# Altium PCB LED_chaser.PcbDoc
Units mm, origin at the board's own origin, x right, y up, seen from the top; angles counter-clockwise.
Board outline 59.5 x 60 mm, 2 copper layers (Top Layer, Bottom Layer), stack 1.1 mm thick; 19 components, 17 nets, 59 pads, 3 vias.
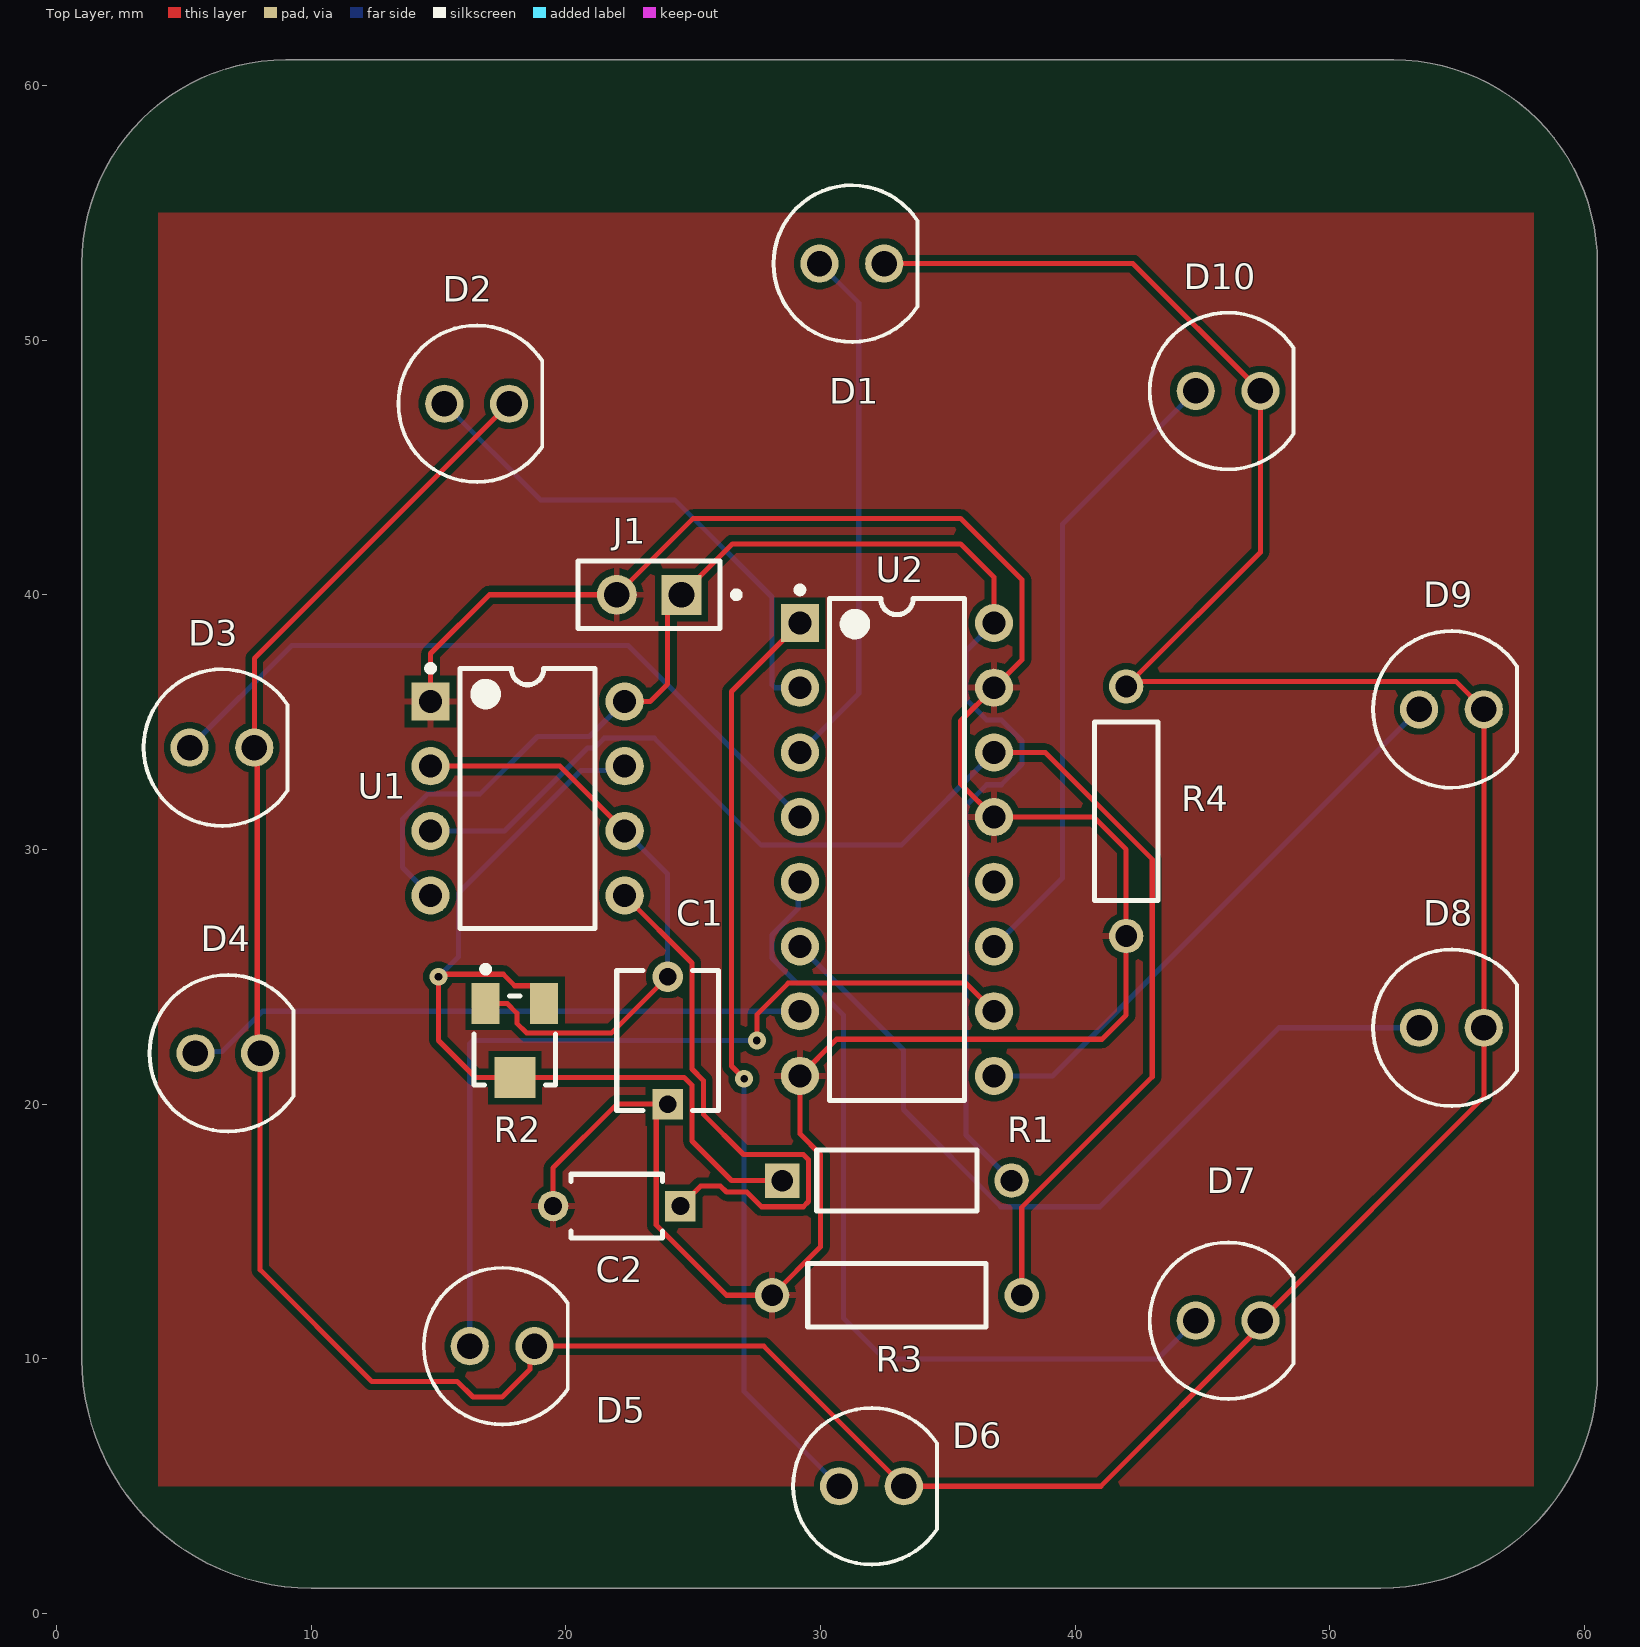
[diagram p0: Top Layer view]
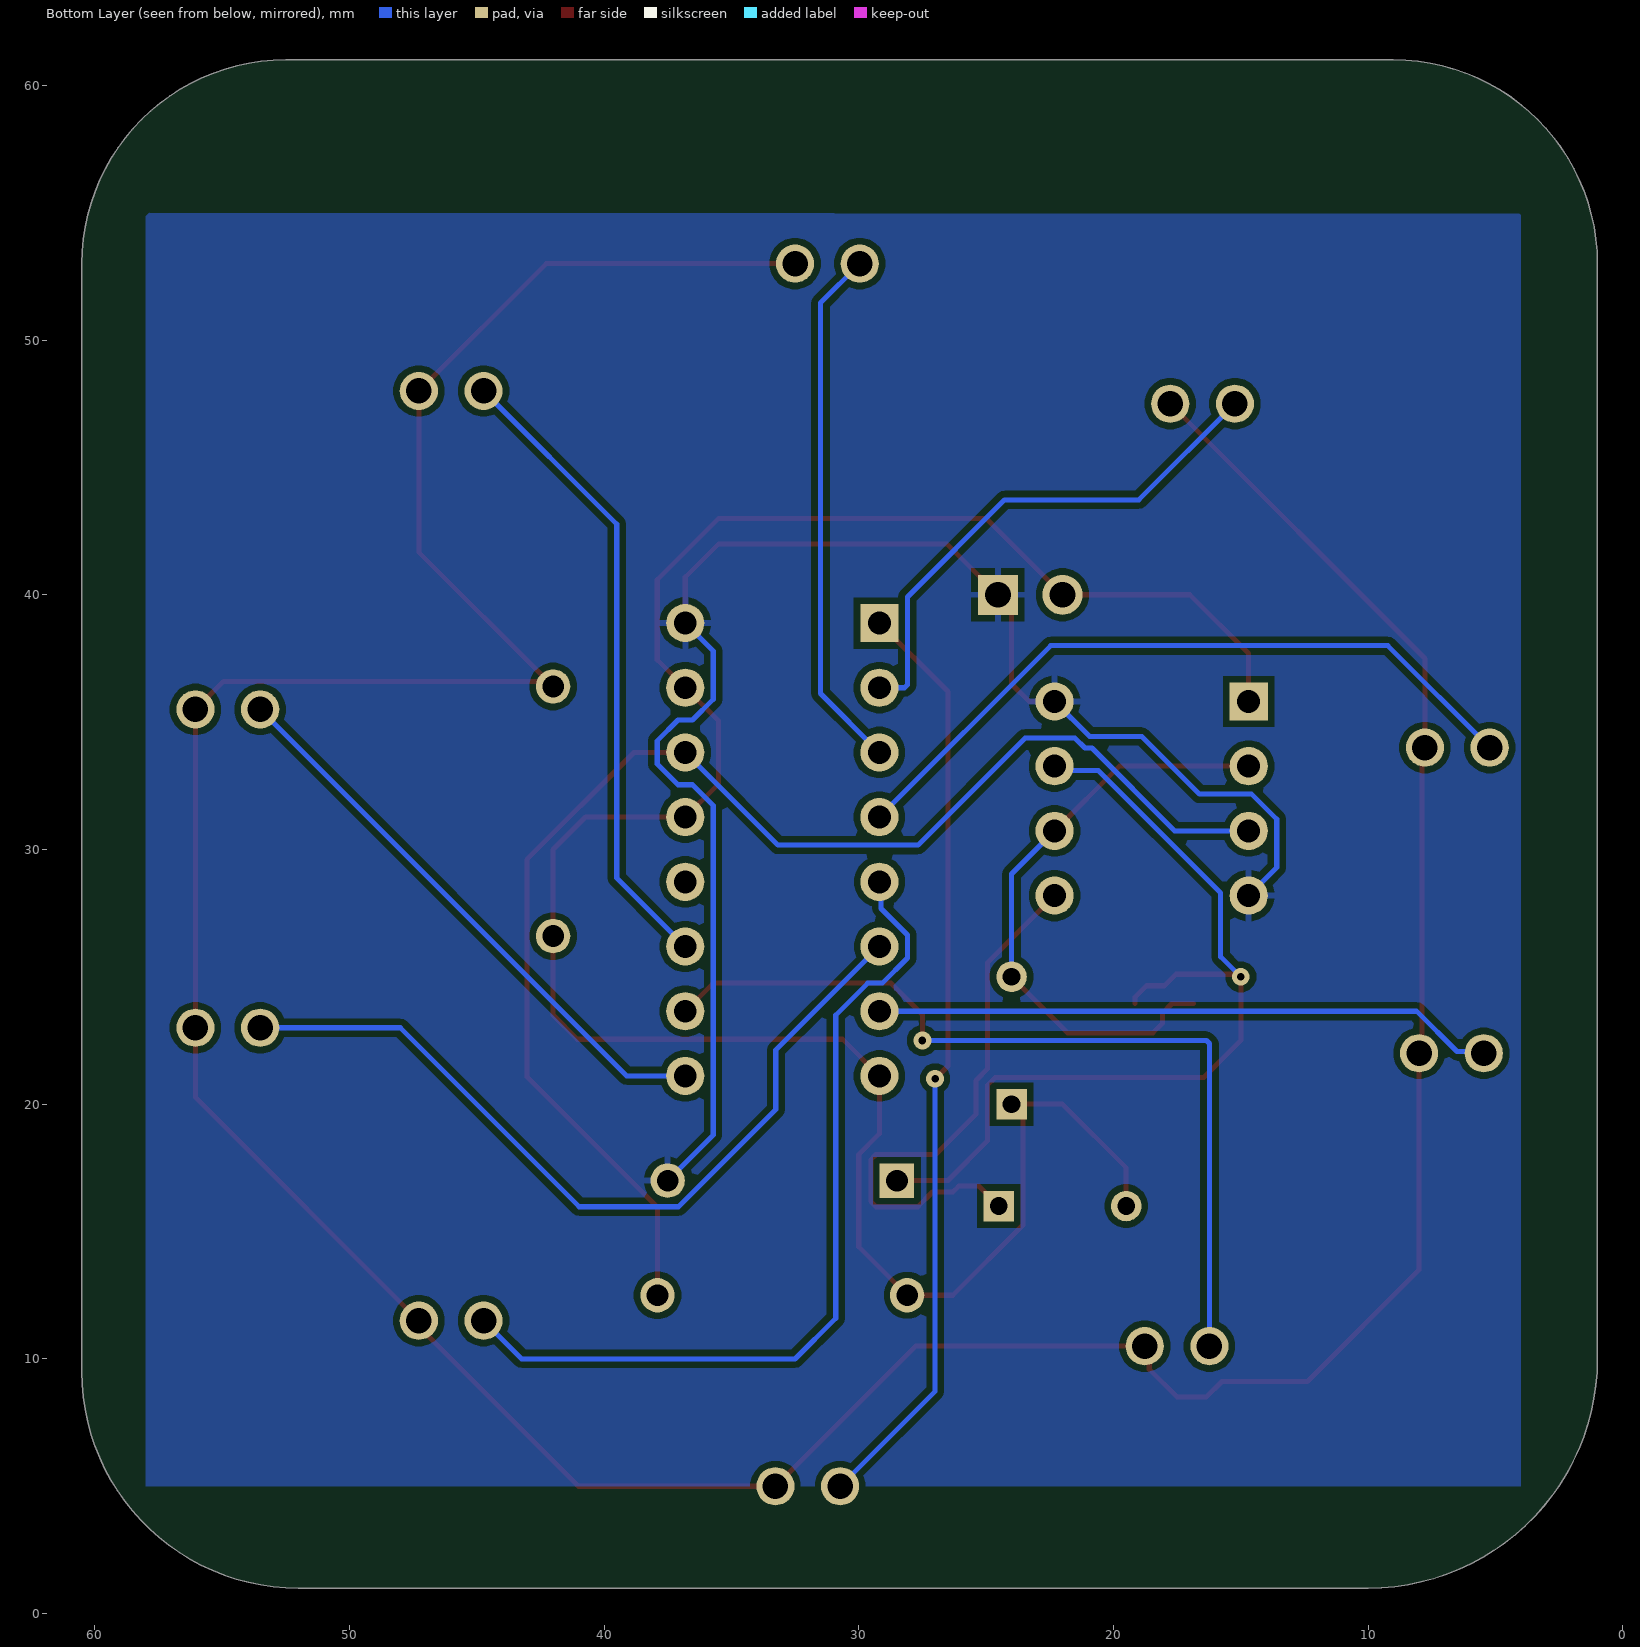
[diagram p1: Bottom Layer view, seen from below]
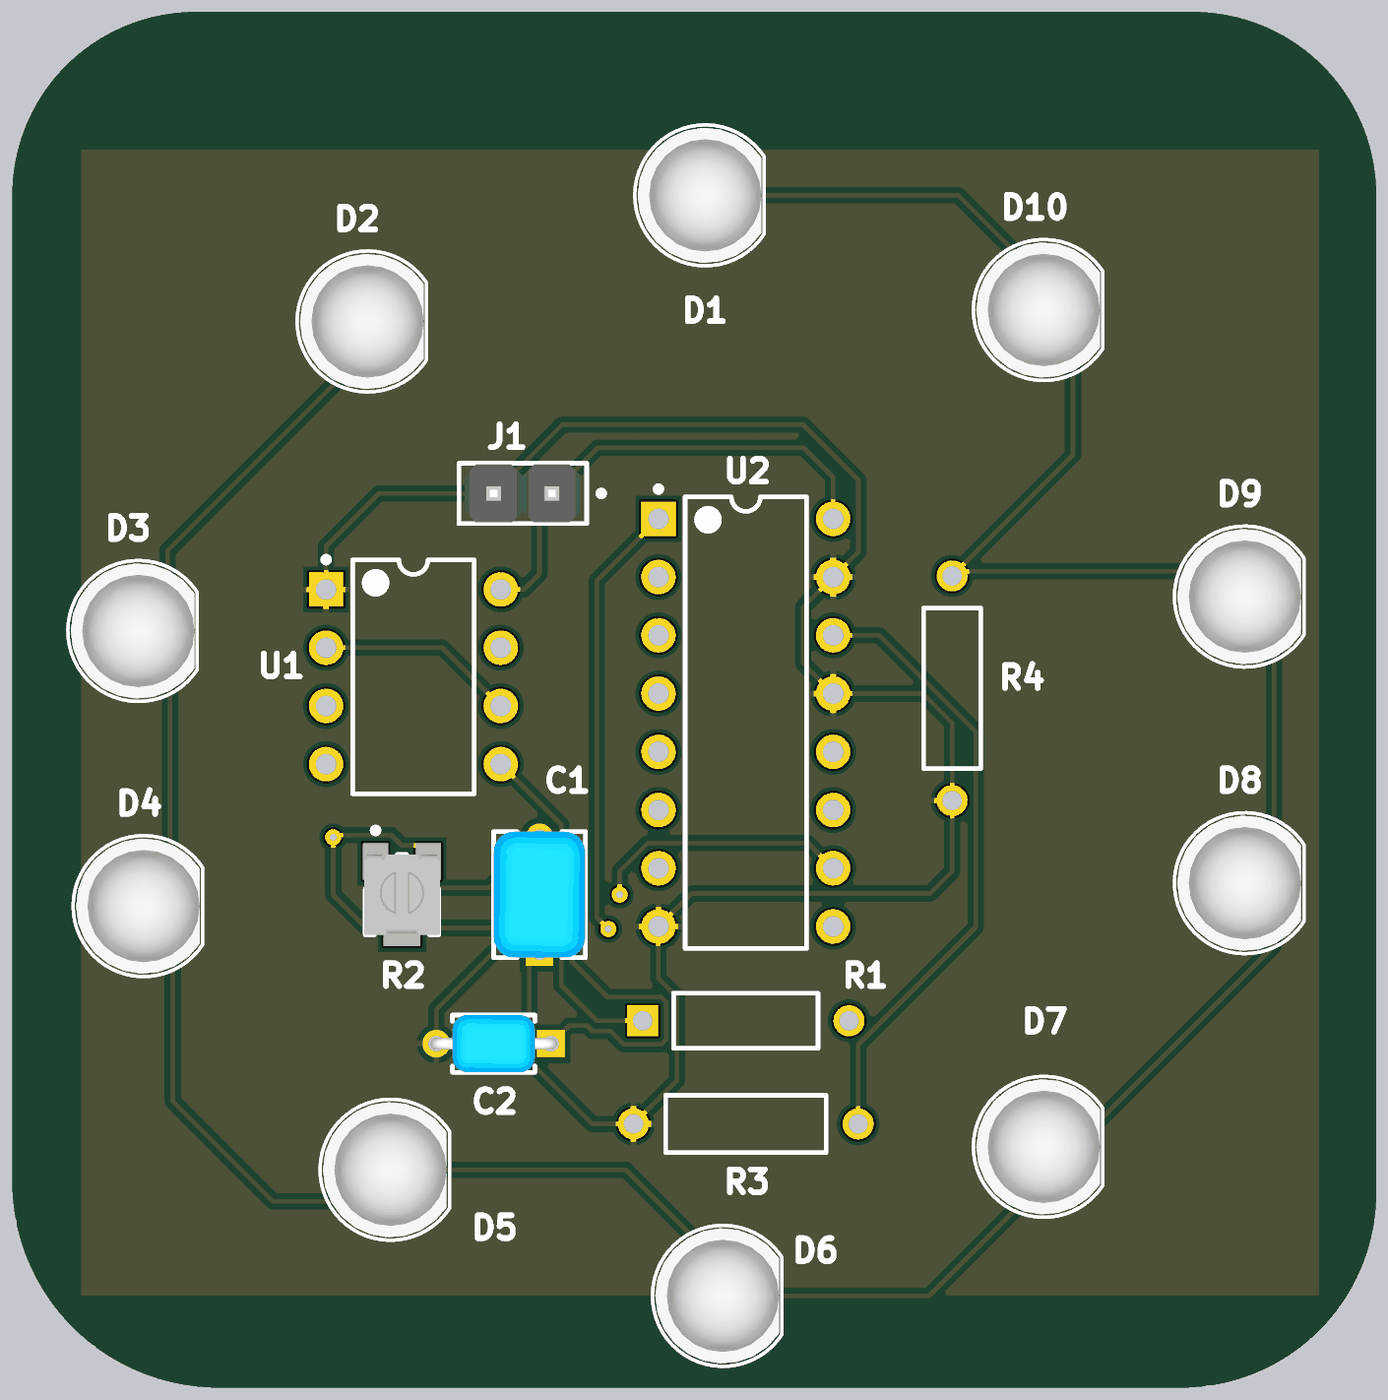
[diagram p2: 3D render of the assembled board from above, using the file's embedded part models]

## Layer stack, top to bottom
Top Solder: solder mask 0.05, SM-001, Dk 4
Top Layer: signal copper 0.1
Dielectric 1: dielectric 0.9, FR-4, Dk 4.8
Bottom Layer: signal copper 0.1
Bottom Solder: solder mask 0.05, SM-001, Dk 4

## Board outline
10,1 52,1 ccw(c52,9.5) 60.5,9.5 60.5,53 ccw(c52.5,53) 52.5,61 9.011,61 ccw(c9,53) 1,53 1,10 ccw(c10,10)

## Design rules (kind name [scope] priority, off if disabled: settings)
Clearance [All] p1: gap=0.25 ignorepadtopadclearanceinfootprint=FALSE
PolygonConnect [All] p1: connectstyle=Relief reliefconductorwidth=0.254 reliefentries=4 polygonreliefangle="90 Angle" airgapwidth=0.254
RoutingVias [All] p1: holewidth=0.4 width=0.5 viastyle="Through Hole" minholewidth=0.4 minwidth=0.5 maxholewidth=0.4 maxwidth=0.5
SolderMaskExpansion [All] p1: expansion=0.102 istentingtop=FALSE
Width Width_POW [(InNet('VCC') OR InNet('GND'))] p1: maxlimit=0.3 minlimit=0.2 preferedwidth=0.2
Width [All] p2: maxlimit=0.2 minlimit=0.1 preferedwidth=0.2
30 further rules are at their usual default settings.

## Components (designator, comment, footprint, x,y, rotation, side; value= is the part's Value field where it differs from the comment)
C1 "RCER71E226MWM1H03A" FP-RCEWM1-MFG 24,22.5 r90 top
C2 "RCER71H103K0K1H03B" FP-RCE0K1-MFG 22,16 r180 top
D1 "151051BS04000" WL-TMRC_D5.9H8.7 31.23,53 r0 top
D2 "151051BS04000" WL-TMRC_D5.9H8.7 16.5,47.5 r0 top
D3 "151051BS04000" WL-TMRC_D5.9H8.7 6.5,34 r0 top
D4 "151051BS04000" WL-TMRC_D5.9H8.7 6.73,22 r0 top
D5 "151051BS04000" WL-TMRC_D5.9H8.7 17.5,10.5 r0 top
D6 "151051BS04000" WL-TMRC_D5.9H8.7 32,5 r0 top
D7 "151051BS04000" WL-TMRC_D5.9H8.7 46,11.5 r0 top
D8 "151051BS04000" WL-TMRC_D5.9H8.7 54.77,23 r0 top
D9 "151051BS04000" WL-TMRC_D5.9H8.7 54.77,35.5 r0 top
D10 "151051BS04000" WL-TMRC_D5.9H8.7 46,48 r0 top
J1 "M20-9990246" FP-M20-9990246-MFG 23.27,40 r180 top
R1 "MFR-25FBF52-1M" RESA60-630X240 33,17 r0 top
R2 "3313J-1-503E" BOUR-3313J-1_V 18,22.5 r270 top
R3 "OD103JE" OMTE-RES7X2.5-2 33,12.5 r0 top
R4 "OD103JE" OMTE-RES7X2.5-2 42,31.5 r90 top
U1 "NE555P" P0008A 18.5,32 r0 top
U2 "CD74HC4017E" N0016A 33,30 r0 top

## Footprints (in the part's own frame and the unit in brackets; to place one, negate y for a bottom-side part, rotate by r counter-clockwise, add the part's x,y. Pads: shape width x height; smd on the part's side, far side on the other; paste and mask are expansions set on the pad)
BOUR-3313J-1_V [mm] "SMD, 3-Leads, Body 3.5x3.2mm, Pitch 1.15mm"
  rect 1.6x1.1 smd paste+0: 1(-1.45,-1.15) 3(-1.45,1.15)
  rect 1.6x1.6 smd paste+0: 2(1.45,0)
  silkscreen extent -2.92,-1.6 1.75,1.6, body extent -1.75,-1.65 1.75,1.65, height 2.11
FP-M20-9990246-MFG [mm]
  rect 1.57x1.57 hole 1.02 paste-2539.97 mask+0: 1(-1.27,0)
  round 1.57 hole 1.02 paste-2539.97 mask+0: 2(1.27,0)
  silkscreen extent -3.55,-1.32 2.79,1.32, body extent -2.89,-1.42 2.89,1.42, height 0.25
FP-RCE0K1-MFG [mm]
  rect 1.2x1.2 hole 0.7 paste-2539.97 mask+0: 1(-2.5,0)
  round 1.2 hole 0.7 paste-2539.97 mask+0: 2(2.5,0)
  silkscreen extent -1.8,-1.25 1.8,1.25, body extent -3.2,-1.35 3.2,1.35, height 0.25
FP-RCEWM1-MFG [mm]
  rect 1.2x1.2 hole 0.7 paste-2539.97 mask+0: 1(-2.5,0)
  round 1.2 hole 0.7 paste-2539.97 mask+0: 2(2.5,0)
  silkscreen extent -2.75,-2 2.75,2, body extent -3.2,-2.1 3.2,2.1, height 0.25
N0016A [mm] "DIP, 16-Leads, Body 19.7x6.6mm, Pitch 2.54mm"
  rect 1.5x1.5 hole 0.9: 1(-3.81,8.89)
  round 1.5 hole 0.9: 2(-3.81,6.35) 3(-3.81,3.81) 4(-3.81,1.27) 5(-3.81,-1.27) 6(-3.81,-3.81) 7(-3.81,-6.35) 8(-3.81,-8.89) 9(3.81,-8.89) 10(3.81,-6.35) 11(3.81,-3.81) 12(3.81,-1.27) 13(3.81,1.27) 14(3.81,3.81) 15(3.81,6.35) 16(3.81,8.89)
  silkscreen extent -3.93,-9.85 2.65,10.31, body extent -3.95,-9.85 3.95,9.85, height 5.08
OMTE-RES7X2.5-2 [mm] "Resistor, Axial; Body 7x2.5mm, Lead Dia. 0.6mm"
  round 1.35 hole 0.85: 1(-4.9,0) 2(4.9,0)
  silkscreen extent -3.5,-1.25 3.5,1.25, body extent -3.5,-1.25 3.5,1.25, height 2.5
P0008A [mm] "DIP, 8-Leads, Body 10.15x6.6mm, Pitch 2.54mm"
  rect 1.5x1.5 hole 0.9: 1(-3.81,3.81)
  round 1.5 hole 0.9: 2(-3.81,1.27) 3(-3.81,-1.27) 4(-3.81,-3.81) 5(3.81,-3.81) 6(3.81,-1.27) 7(3.81,1.27) 8(3.81,3.81)
  silkscreen extent -3.93,-5.1 2.65,5.23, body extent -3.95,-5.07 3.95,5.07, height 5.08
RESA60-630X240 [mm] "Axial Resistor, 2-Leads, Dia 2.4mm, Body Length 6.3mm"
  rect 1.35x1.35 hole 0.85: 1(-4.5,0)
  round 1.35 hole 0.85: 2(4.5,0)
  silkscreen extent -3.15,-1.2 3.15,1.2, body extent -3.15,-1.2 3.15,1.2, height 2.4
WL-TMRC_D5.9H8.7 [mm] "THT Mono-color Round Color LED, 2-leads"
  round 1.5 hole 1: 1(-1.27,0) 2(1.27,0)
  silkscreen extent -3.07,-3.07 2.58,3.08, body extent -2.95,-2.95 2.45,2.95, height 9.2

## Part data
C1: library part CMP-06035-003622-1, "CAP CER 22UF 25V X7R RADIAL", Capacitance=22uF, Case/Package=Radial, Dielectric=X7R, Max Operating Temperature=125°C, Min Operating Temperature=-55°C, Package Quantity=1500, Ratings=AEC-Q200, Resistor Type=Ceramic, Tolerance=20%, Voltage Rating=25V, Height=7.5mm, Height - Seated (Max)=0.295inch, Lead Diameter=0.5mm, Lead Pitch=0.197inch, Lead/Base Style="Formed Leads", Length=0.217inch, Mount="Through Hole", Packaging="Tape and Reel", Termination=Radial, Voltage Rating (DC)=25V, Width=0.157inch
C2: library part CMP-06035-044411-1, "Cap Ceramic 10nF 50V X7R ±10% Radial 5mm +125°C Automotive Bulk", Capacitance=10nF, Case/Package=Radial, Dielectric=X7R, Max Operating Temperature=125°C, Min Operating Temperature=-55°C, Package Quantity=500, Ratings=AEC-Q200, Resistor Type=Ceramic, Tolerance=10%, Voltage Rating=50V, Height=3.5mm, Height - Seated (Max)=0.138inch, Lead Diameter=0.5mm, Lead Free="Lead Free", Lead Pitch=0.197inch, Lead/Base Style="Formed Leads", Length=0.142inch, Mount="Through Hole", Packaging=Bulk, Termination=Radial, Voltage Rating (DC)=50V, Width=0.098inch
D1 D2 D3 D4 D5 D6 D7 D8 D9 D10: library part CMP-1488-00009-2, Case/Package=Radial, Color=Blue, Forward Current=100mA, Forward Voltage=3.2V, Max Operating Temperature=85°C, Max Reverse Voltage (DC)=5V, Min Operating Temperature=-40°C, Test Current=20mA, Dominant Wavelength=470nm, Height=8.6mm, Length=5mm, Lens Size=5mm, Lens Style="Circular, Diffused, Round", Luminous Intensity=500mcd, Mount="Through Hole", NexarPartId=29717812, Packaging=Bulk, Peak Wavelength=465nm, REACH SVHC=Unknown, RoHS=Compliant, Viewing Angle=40°, Wavelength=470nm, Width=5mm
J1: library part CMP-15831-000009-1, "CONN HEADER VERT 2POS 2.54MM", Current Rating=3A, Manufacturer=Harwin, Temperature="-40°C to +105°C", Temperature Range High=+105°C, Temperature Range Low=-40°C, Automotive=No, Category=Conn, ComponentLink2Description=Datasheet, ComponentLink2URL=https://cdn.harwin.com/pdfs/M20-999.pdf, Conn Gender=Male, Conn Orientation=Vertical, Contact Material=Tin,Nickel, Device Class L1=Connectors, Device Class L2="Headers and Wire Housings", Device Class L3=unset, Digikey Description="CONN HEADER VERT 2POS 2.54MM", Height=8.99mm, Lead Free=Yes, Manufacturer Part Number=M20-9990246, Mouser Description="2.54mm (0.1\") Pitch SIL Vertical PC Tail Pin Header, 6.1mm mating pin height, tin, 2 contacts", Number Of Contacts=2, Number Of Rows=1, Octopart=https://octopart.com/m20-9990246-harwin-2590635, Package=M20-9990246, Pitch=2.54mm, RoHS=TRUE
R1: library part CMP-1659-00070-1, "Axial Resistor, 1 MOhm, +/- 1%, 250 mW, -55 to 155 degC, 2-Pin THD, RoHS, Bulk", Case\Package=Axial, Max Operating Temperature="155 degC", Min Operating Temperature="-55 degC", Package Quantity=200, Power Rating="250 mW", Resistance=1M, Tolerance=1%, Voltage Rating="250 V", ComponentLink1Description="Manufacturer URL", ComponentLink1URL=http://www.yageo.com/, ComponentLink2Description=Datasheet, ComponentLink2URL=http://www.yageo.com/documents/recent/Yageo%20LR_MFR_2013.pdf, DatasheetVersion=Apr-13, Length="0.248 inch", Mount="Through Hole", PackageDescription="2-Pin Axial Lead, Dia 2.4 mm, Body Length 6.3 mm", PackageReference=MFR-25, Packaging=Bulk, RoHSCompliant=true
R2: library part CMP-2000-05588-1, "3 mm Trimpot(R) Trimming Potentiometer, 50 KOhm, +/- 20%, 0.125 W, -55 to 125 degC, 3-Pin SMD, RoHS, Tape and Reel", Manufacturer=Bourns, Package Description="3-Pin Surface Mount Device, Body 3.5 x 3.2 mm, Pitch 1.15 mm", Package Reference=3313J-1, Power Rating=125mW, Resistance Tolerance=±20%, Temperature Coefficient=±150ppm/°C, Track Resistance=50k, Datasheet URL=http://www.bourns.com/docs/Product-Datasheets/3313.pdf, Datasheet Version=05/2016, Manufacturer URL=http://www.bourns.com/, Mounting Technology=SurfaceMount, No. of Turns=1, Potentiometer Mounting=SMD, SVHC=NoSVHC(19-Dec-2012)
R3: library part CMP-2000-06865-1, "Little Demon(R) Carbon Composition Molded OD Series, 250 V, 10 KOhm, +/-5%, -70 to 130 degC, 2-Pin THD, RoHS, Bulk", Manufacturer=Ohmite, Operating Temperature=-, Package / Case=Axial, Package Description="2-Pin THD Resistor, Body 7 x 2.5 mm, Lead Dia. 0.6 mm", Package Reference=RES7X2.5, Power (Watts)=0.25W,1/4W, Power Rating=0.25W, Resistance (Ohms)=10k, Standard Package=100, Tolerance=±5%, Catalog Drawings=OD,OF,OASeries, Category=Resistors, Composition=CarbonComposition, Datasheet URL=http://www.ohmite.com/cat/res_od_of_oa.pdf, Datasheet Version=06/2016, EDA / CAD Models=DownloadfromAcceleratedDesigns, Family=ThroughHoleResistors, Features=PulseWithstanding, Height=-, Manufacturer URL=http://www.ohmite.com/, Mounting Technology=ThroughHole, Number of Terminations=2, Online Catalog=OD,OF,OASeries,LittleDemon®, Packaging=Bulk, PartNumber=OD103JE, RoHS Information="LittleDemon\"E\"SeriesMaterialDeclaration", Series=LittleDemon®OD, Size / Dimension="0.098\"Diax0.276\"L(2.50mmx7.00mm)", Supplier Device Package=Axial, Temperature Coefficient=-
R4: library part CMP-2000-06865-1, "Little Demon(R) Carbon Composition Molded OD Series, 250 V, 10 KOhm, +/-5%, -70 to 130 degC, 2-Pin THD, RoHS, Bulk", Manufacturer=Ohmite, Operating Temperature=-, Package / Case=Axial, Package Description="2-Pin THD Resistor, Body 7 x 2.5 mm, Lead Dia. 0.6 mm", Package Reference=RES7X2.5, Power (Watts)=0.25W,1/4W, Power Rating=0.25W, Resistance (Ohms)=120, Standard Package=100, Tolerance=±5%, Catalog Drawings=OD,OF,OASeries, Category=Resistors, Composition=CarbonComposition, Datasheet URL=http://www.ohmite.com/cat/res_od_of_oa.pdf, Datasheet Version=06/2016, EDA / CAD Models=DownloadfromAcceleratedDesigns, Family=ThroughHoleResistors, Features=PulseWithstanding, Height=-, Manufacturer URL=http://www.ohmite.com/, Mounting Technology=ThroughHole, Number of Terminations=2, Online Catalog=OD,OF,OASeries,LittleDemon®, Packaging=Bulk, PartNumber=OD103JE, RoHS Information="LittleDemon\"E\"SeriesMaterialDeclaration", Series=LittleDemon®OD, Size / Dimension="0.098\"Diax0.276\"L(2.50mmx7.00mm)", Supplier Device Package=Axial, Temperature Coefficient=-
U1: library part CMP-2000-04954-1, "Precision Timer, 4.5 to 16 V, 0 to 70 degC, 8-Pin DIP, Pb-Free, Tube", Manufacturer=TexasInstruments, Maximum High Level Output Current=-200mA, Maximum Low Level Output Current=200mA, Operating Supply Voltage=5, Package=8PDIP, Package Description="8-Pin Double In-line Package, Body 9.59 x 6.35 mm, Pitch 2.54 mm", Package Reference=P8, Category=Timer, Datasheet URL=http://www.ti.com/general/docs/lit/getliterature.tsp?genericPartNumber=NE555&fileType=pdf, Datasheet Version="Rev. I, 09/2014", Manufacturer URL=http://www.ti.com/, Number of Internal Timers=1, Package URL=http://www.ti.com/lit/ml/mpdi001b/mpdi001b.pdf, Packaging=Rail/Tube, Rad Hard=No, Type=Standard
U2: library part CMP-1623-00548-2, "High Speed CMOS Logic Decade Counter/Divider with 10 Decoded Outputs, N0016A, TUBE", F @ Nom Voltage(Max)(Mhz)=28, Generic Part Number=CD74HC4017, ICC @ Nom Voltage(Max)(mA)=0.08, Manufacturer="Texas Instruments", Operating Temperature Range(C)="-55 to 125", Rating=Catalog, tpd @ Nom Voltage(Max)(ns)=54, Voltage(Nom)(V)=3.3,5, Bits(#)=10, Code_JEDEC=MS-001, DatasheetVersion=SCHS200D, Function=Counter, Input Type=LVTTL/CMOS, Inputs=1, Output Drive (IOL/IOH)(Max)(mA)=5.2/-5.2, Output Type=CMOS, PackageReference=N0016A, Schmitt Trigger=No, Technology Family=HC, Type=Decade, VCC(Max)(V)=6, VCC(Min)(V)=2

## Via types
v1: diameter 0.7, hole 0.3, Top Layer to Bottom Layer, 3 vias

## Nets (pads, with @x,y where several pads share a name; then routed paths per layer and width w, separated by ;. In a path a pad name is that pad's centre, name@x,y a point inside that pad or via, vN(x,y) a via of type N, cw(c..) or ccw(c..) an arc to the next point about the centre after c; other vN are vias at no path point)
GND: C1.1 C2.2 J1.2 R3.1 R4.1 U1.1 U2.8 U2.13 U2.15 | length 92.6
  Top Layer w0.2: U1.1 14.69,37.69 17,40 J1.2 25,43 35.5,43 37.91,40.59 37.91,37.45 U2.15 35.5,35.04 35.5,32.58 U2.13 40.73,31.27 42,30 R4.1 42,23.5 41.05,22.55 30.63,22.55 U2.8 29.19,18.834 30,18.024 30,14.4 R3.1 26.305,12.5 23.55,15.255 23.55,19.55 C1.1 22,20 19.5,17.5 C2.2
NetC1_2: C1.2 R2.1 U1.2 U1.6 | length 23.9
  Top Layer w0.2: U1.2 19.77,33.27 U1.6 ; R2.1 17.7,23.95 18.078,23.572 18.078,23.178 18.455,22.8 21.8,22.8 C1.2
  Bottom Layer w0.2: U1.6 24,29.04 C1.2
NetC2_1: C2.1 U1.5 | length 22.1
  Top Layer w0.2: U1.5 22.31,28.185 24.95,25.545 24.95,21.381 25.4,20.931 25.4,19.6 26.975,18.025 29.32,18.025 29.525,17.82 29.525,16.18 29.32,15.975 27.68,15.975 27.105,16.55 26.31,16.55 26.078,16.783 25.283,16.783 C2.1
NetD1_1: D1.1 U2.3 | length 20.8
  Bottom Layer w0.2: U2.3 31.5,36.12 31.5,51.46 D1.1
NetD1_2: D1.2 D2.2 D3.2 D4.2 D5.2 D6.2 D7.2 D8.2 D9.2 D10.2 R4.2 | length 158.5
  Top Layer w0.2: D2.2 7.77,37.5 D3.2 7.885,33.885 7.885,22.115 D4.2 8,13.5 12.383,9.117 15.735,9.117 16.352,8.5 17.224,8.5 17.5,8.5 18.593,9.593 18.593,10.323 D5.2 27.77,10.5 D6.2 41,5 47.27,11.27 D7.2 56.04,20.27 D8.2 D9.2 54.94,36.6 R4.2@42.2,36.6 ; D1.2 42.27,53 D10.2 47.27,41.67 R4.2@42.2,36.6 ; R4.2 R4.2@42.2,36.6
NetD2_1: D2.1 U2.2 | length 20.6
  Bottom Layer w0.2: D2.1 19.005,43.726 24.274,43.726 28.09,39.91 28.09,36.467 28.207,36.35 U2.2
NetD3_1: D3.1 U2.4 | length 28.4
  Bottom Layer w0.2: D3.1 9.23,38 22.46,38 U2.4
NetD4_1: D4.1 U2.7 | length 24.4
  Bottom Layer w0.2: D4.1 5.526,22.066 6.51,22.066 8.094,23.65 U2.7
NetD5_1: D5.1 U2.10 | length 34.5
  Top Layer w0.2: v1(27.5,22.5) 27.5,23.516 28.734,24.75 35.71,24.75 U2.10
  Bottom Layer w0.2: D5.1 16.23,22.383 16.347,22.5 v1(27.5,22.5)
NetD6_1: D6.1 U2.1 | length 36.8
  Top Layer w0.2: v1(27,21) 26.5,21.5 26.5,36.2 U2.1
  Bottom Layer w0.2: v1(27,21) 27,8.73 D6.1
NetD7_1: D7.1 U2.5 | length 34.2
  Bottom Layer w0.2: U2.5 29.124,28.664 29.124,27.68 28.09,26.646 28.09,25.734 29.074,24.75 29.646,24.75 30.903,23.493 30.903,11.597 32.5,10 43.23,10 D7.1
NetD8_1: D8.1 U2.6 | length 32.8
  Bottom Layer w0.2: U2.6 33.257,22.123 33.257,19.793 37.075,15.975 40.975,15.975 48,23 D8.1
NetD9_1: D9.1 U2.9 | length 22.7
  Bottom Layer w0.2: U2.9 39.11,21.11 D9.1
NetD10_1: D10.1 U2.11 | length 25.1
  Bottom Layer w0.2: U2.11 39.5,28.88 39.5,42.77 D10.1
NetR1_1: R1.1 R2.2 R2.3 U1.7 | length 36.6
  Top Layer w0.2: R2.3 19.15,24.2 18.7,24.65 17.995,24.65 17.545,25.1 15.235,25.1 15.135,25 v1(15,25) 15,22.5 16.45,21.05 R2.2 24.645,21.05 24.95,20.745 24.95,18.55 26.5,17 R1.1
  Bottom Layer w0.2: v1(15,25) 15.79,25.79 15.79,28.19 15.79,28.29 15.848,28.348 20.598,33.098 22.138,33.098 U1.7
NetR3_2: R3.2 U1.3 U2.14 | length 54.1
  Top Layer w0.2: U2.14 38.826,33.81 43.025,29.611 43.025,21.075 37.9,15.95 R3.2
  Bottom Layer w0.2: U1.3 17.594,30.73 20.847,33.983 21.12,33.983 21.506,34.37 23.476,34.37 27.676,30.17 33.17,30.17 U2.14
VCC: J1.1 R1.2 U1.4 U1.8 U2.16 | length 60.8
  Top Layer w0.2: U1.8 23.31,35.81 24,36.5 24,39.46 26.54,42 35.5,42 36.81,40.69 U2.16
  Bottom Layer w0.2: U1.4 13.59,29.29 13.59,31.186 14.574,32.17 16.622,32.17 18.885,34.433 20.933,34.433 U1.8 ; U2.16 35.71,37.79 35.71,35.894 36.524,35.08 37.096,35.08 37.91,34.266 37.91,33.354 37.096,32.54 36.524,32.54 35.71,31.726 35.71,18.79 R1.2
pads on no net: U2.12

## Polygon pours and split planes (outlines as drawn)
GND on Top Layer "NONET_L02_P-001" (solid, pour order 0): 58,55 58,5 4,5 4,55
VCC on Bottom Layer "NONET_L02_P-001" (solid, pour order 1): 4.071,54.953 58,55 58,5 4,5 4,55